# Altium PCB 08-DcMotorEncoder.PcbDoc
Units mm, origin at the board's own origin, x right, y up, seen from the top; angles counter-clockwise.
Board outline 40 x 40 mm, 4 copper layers (Top Layer, Internal Plane 1, Internal Plane 2, Bottom Layer), stack 0.462 mm thick; 42 components, 26 nets, 133 pads, 0 vias.
Unrouted connection lines stored in the file: 88.
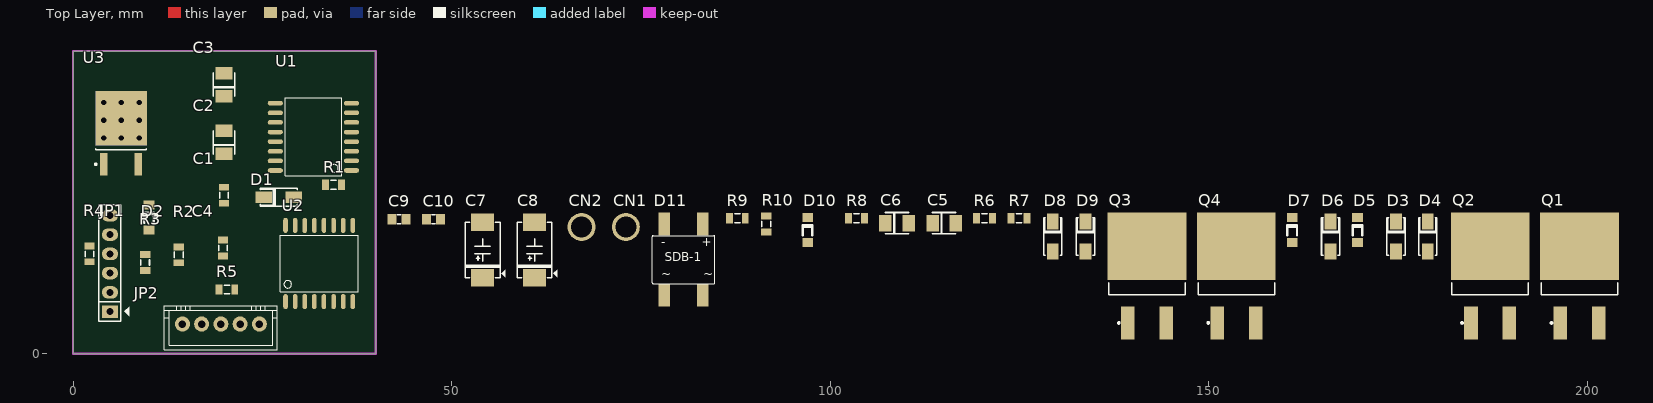
[diagram p0: Top Layer view]
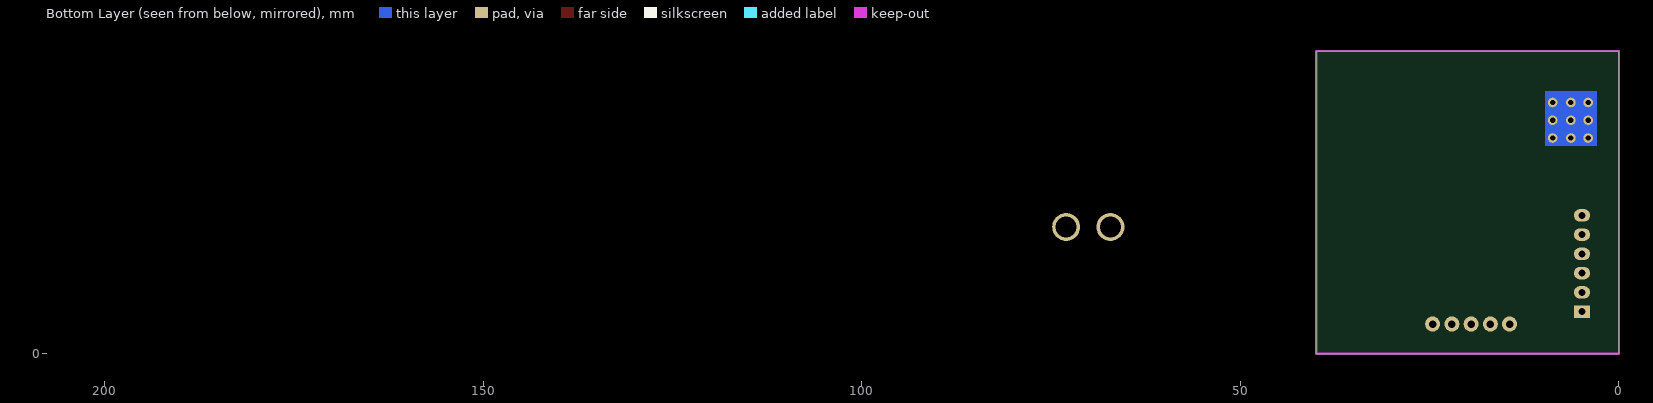
[diagram p1: Bottom Layer view, seen from below]
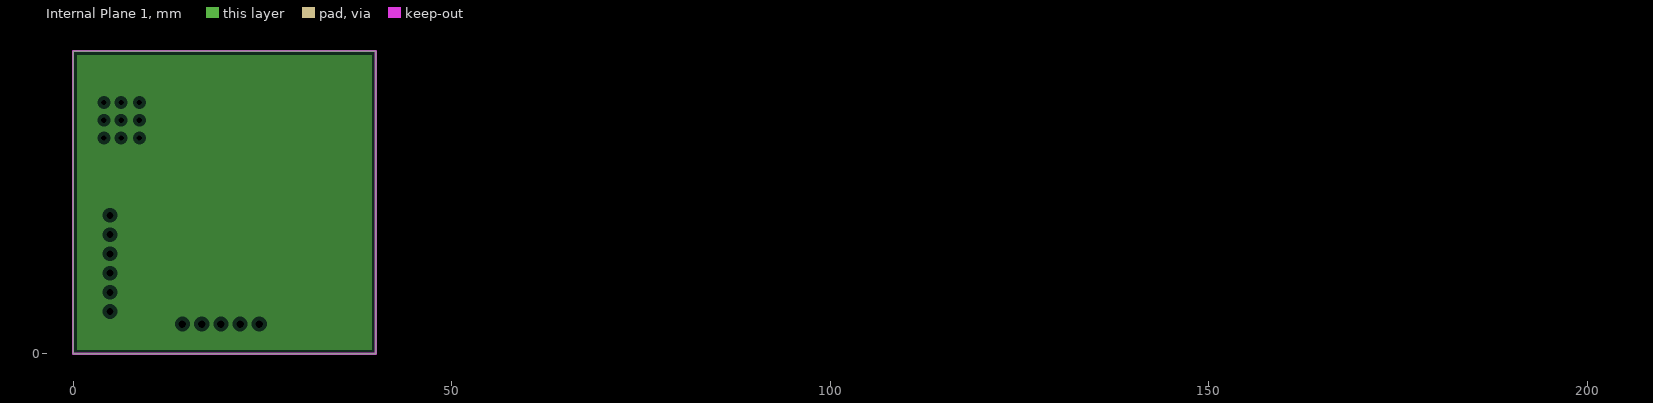
[diagram p2: Internal Plane 1, clearances drawn from the general rule]
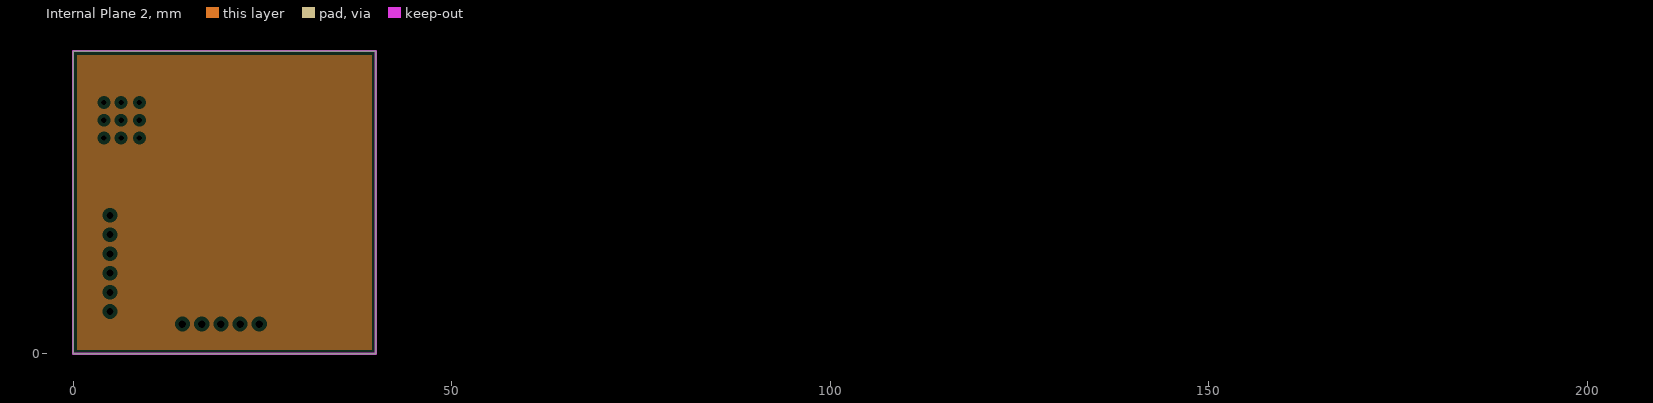
[diagram p3: Internal Plane 2, clearances drawn from the general rule]

## Layer stack, top to bottom
Top Solder: solder mask 0.0102, Solder Resist, Dk 3.5
Top Layer: signal copper 0.0356
Internal Plane 1: plane copper 0.0356
Internal Plane 2: plane copper 0.0356
Dielectric 1: dielectric 0.32, FR-4, Dk 4.8
Bottom Layer: signal copper 0.0356
Bottom Solder: solder mask 0.0102, Solder Resist, Dk 3.5

## Board outline
0,0 0,40 40,40 40,0

## Design rules (kind name [scope] priority, off if disabled: settings)
Clearance [All] p1: gap=0.2
PlaneClearance [All] p1: clearance=0.508
PlaneConnect [All] p1: planeconnectstyle=Relief reliefexpansion=0.508 reliefentries=4 reliefconductorwidth=0.254 reliefairgap=0.254
PolygonConnect [All] p1: connectstyle=Relief reliefconductorwidth=0.254 reliefentries=4 polygonreliefangle="90 Angle" airgapwidth=0.254
RoutingVias [All] p1: holewidth=0.6 width=1 viastyle="Through Hole" minholewidth=0.711 minwidth=1.27 maxholewidth=0.711 maxwidth=1.27
SolderMaskExpansion [All] p1: expansion=0.102
Width [All] p1: maxlimit=0.2 minlimit=0.2 preferedwidth=0.2
28 further rules are at their usual default settings.

## Components (designator, comment, footprint, x,y, rotation, side; value= is the part's Value field where it differs from the comment)
C1 "104" R-0805 19.939,20.951 r90 top (schematic designator c1)
C2 "10U16V" C-TANT-1210 19.939,27.933 r90 top
C3 "10U16V" C-TANT-1210 19.939,35.56 r90 top
C4 "104" R-0805 19.812,13.97 r90 top (schematic designator c4)
C5 "10U16V" C-TANT-1210 115.062,17.272 r0 top
C6 "10U16V" C-TANT-1210 108.839,17.272 r0 top
C7 "470uF" C-TANT-7343-31-CASEA 54.102,13.716 r90 top
C8 "470uF" C-TANT-7343-31-CASEA 60.96,13.716 r90 top
C9 "104" C-0805 43.053,17.78 r0 top
C10 "104" C-0805 47.625,17.78 r0 top
CN1 "COCDONGM3" M3 73.025,16.764 r0 top
CN2 "COCDONGM3" M3 67.183,16.764 r0 top
D1 "1N4007" D-DO214-AC 27.178,20.701 r180 top
D2 "1N4148" D-DO213-AA 10.033,16.383 r90 top
D3 "1N4007" D-DO214-AC 174.752,15.494 r90 top
D4 "1N4007" D-DO214-AC 178.943,15.494 r90 top
D5 "1N4148" D-DO213-AA 169.672,14.732 r90 top
D6 "1N4007" D-DO214-AC 166.116,15.494 r90 top
D7 "1N4148" D-DO213-AA 161.036,14.732 r90 top
D8 "1N4007" D-DO214-AC 129.413,15.494 r90 top
D9 "1N4007" D-DO214-AC 133.731,15.494 r90 top
D10 "1N4148" D-DO213-AA 97.028,14.732 r90 top
D11 "DB 1A" D-DB-1A-SMD 80.645,12.446 r0 top
JP1 "MCU CTR" JP6 4.886,5.588 r90 top
JP2 "DC MOTOR" CONN-XH2.54-5P 19.531,3.937 r180 top
Q1 "IRFS4410" TO-263-3 199.009,10.287 r90 top
Q2 "IRFS4410" TO-263-3 187.198,10.287 r90 top
Q3 "IRFS4410" TO-263-3 141.859,10.287 r90 top
Q4 "IRFS4410" TO-263-3 153.67,10.287 r90 top
R1 "22" R-0805 34.417,22.339 r0 top
R2 "10K" R-0805 13.97,13.081 r90 top
R3 "10K" R-0805 9.525,12.065 r90 top
R4 "22" R-0805 2.159,13.208 r90 top
R5 "22" R-0805 20.32,8.509 r0 top
R6 "10K" R-0805 120.396,17.907 r0 top
R7 "10K" R-0805 124.968,17.907 r0 top
R8 "22" R-0805 103.505,17.907 r0 top
R9 "1K" R-0805 87.757,17.907 r0 top
R10 "1K" R-0805 91.567,17.145 r90 top
U1 "IR2110" SOIC-16-W 31.75,28.667 r90 top
U2 "IR2110" SOIC-16-W 32.512,11.938 r0 top
U3 "ASM1117" TO-252 6.35,29.142 r90 top

## Footprints (in the part's own frame and the unit in brackets; to place one, negate y for a bottom-side part, rotate by r counter-clockwise, add the part's x,y. Pads: shape width x height; smd on the part's side, far side on the other; paste and mask are expansions set on the pad)
C-0805 [mm] "Chip Capacitor, 2-Leads, Body 2.0x1.3mm, IPC Medium Density"
  rect 1.15x1.4 smd: 1(-0.925,0) 2(0.925,0)
  silkscreen extent -0.22,-0.6 0.23,0.6, body extent -1,-0.63 1,0.63, height 0.5
C-TANT-1210 [mil]
  rect 65x86.61 smd: 1(-60,0) 2(60,0)
  silkscreen extent -61,-55 61,55, body extent -70,-55 70,55, height 75
C-TANT-7343-31-CASEA [mm] "Tantalium Capacitor 7343-31"
  rect 2.3x3 smd: 1(-3.65,0) 2(3.65,0)
  silkscreen extent -3.65,-3 3.65,2.3, body extent -3.8,-2.3 3.8,2.3, height 3.1
CONN-XH2.54-5P [mm]
  round 2 hole 1: 1(-5.08,0) 2(-2.54,0) 3(0,0) 4(2.54,0) 5(5.08,0)
  silkscreen extent -7.45,-2.4 7.45,3.4, body extent -7.45,-2.4 7.45,3.4, height 7.05
D-DB-1A-SMD [mm] "DB106S"
  rect 1.5x3 smd: 1(-2.55,-4.713) 2(2.55,-4.713) 3(2.55,4.713) 4(-2.55,4.713)
  silkscreen extent -4.15,-3.18 4.15,3.18, body extent -4.15,-4.95 4.15,4.95, height 3.35
D-DO213-AA [mm]
  rect 1.2x1.4 smd: 1(0,0) 2(3.302,0)
  silkscreen extent 0.89,-0.63 2.29,0.64, body extent 0,-0.75 3.3,0.75, height 1.5
D-DO214-AC [mm] "Molded Diode, 2-Leads, Body 4.3x2.6mm, IPC Medium Density"
  rect 2.15x1.55 smd: 1(-1.979,0) 2(1.979,0)
  silkscreen extent -2.46,-1.25 2.46,1.25, body extent -2.46,-1.2 2.46,1.2, height 2.45
JP6 [mil] "JP6"
  rect 65x85 hole 36: 1(0,0)
  oval 65x85 hole 36: 2(100,0) 3(200,0) 4(300,0) 5(400,0) 6(500,0)
  silkscreen extent -50,-99 556,58, body extent -48,-50 548,48, height 323
M3 [mm]
  round 3.7 hole 2.8: 1(0,0)
R-0805 [mm] "Chip Resistor, 2-Leads, Body 2.0x1.3mm, IPC Medium Density"
  rect 0.9x1.35 smd: 1(-1.05,0) 2(1.05,0)
  silkscreen extent -0.38,-0.58 0.38,0.58, body extent -1,-0.63 1,0.63, height 0.5
SOIC-16-W [mm]
  oval 0.6x2 smd: 1(-4.445,-5.031) 2(-3.175,-5.031) 3(-1.905,-5.031) 4(-0.635,-5.031) 5(0.635,-5.031) 6(1.905,-5.031) 7(3.175,-5.031) 8(4.445,-5.031) 9(4.445,5.031) 10(3.175,5.031) 11(1.905,5.031) 12(0.635,5.031) 13(-0.635,5.031) 14(-1.905,5.031) 15(-3.175,5.031) 16(-4.445,5.031)
  silkscreen extent -5.15,-3.75 5.15,3.75, body extent -5.15,-5.16 5.15,5.16, height 2.9
TO-252 [mm] "AMS1117"
  rect 3x1 smd: 1(-4.1,2.29) 3(-4.1,-2.29)
  round 1.27 hole 0.7: 2(-0.635,2.286) 2(-0.635,0) 2(-0.635,-2.413) 2(1.714,-2.413) 2(1.714,0) 2(1.714,2.286) 2(4.064,-2.413) 2(4.064,0) 2(4.064,2.286)
  rect 7.2x6.8 smd: 2(1.95,0)
  Bottom Layer region: -1.651,3.404 5.563,3.404 5.563,-3.404 -1.626,-3.404 -1.651,-3.404 -1.651,-3.378
  silkscreen extent -4.22,-3.35 -2.05,3.46, body extent -4.55,-3.37 5.36,3.37, height 2.39
TO-263-3 [mm] "D2-PAK, 3-Pads, Body 9.0x10.1mm (max), IPC Medium Density"
  rect 4.4x1.8 smd: 1(-6.2,2.54) 3(-6.2,-2.54)
  rect 8.9x10.4 smd: 2(3.95,0)
  silkscreen extent -6.32,-5.05 -0.9,5.05, body extent -7.89,-5.25 7.63,5.25, height 4.65

## Part data
C1 C4: library part "CAP NP"
C2 C3 C5 C6: library part "CAP POL"
C7 C8: library part CP1, "Cap P  0,1uF < 22uF , 16 - 50V"
C9 C10: library part CN
D1 D2 D3 D4 D5 D6 D7 D8 D9 D10: library part DIODE
D11: library part DB
JP1: library part JP6, "JP6 PIN"
JP2: library part JP5
R1 R2 R3 R4 R5 R6 R7 R8 R9 R10: library part Res1, "Resistor"

## Nets (pads, with @x,y where several pads share a name; then routed paths per layer and width w, separated by ;. In a path a pad name is that pad's centre, name@x,y a point inside that pad or via, vN(x,y) a via of type N, cw(c..) or ccw(c..) an arc to the next point about the centre after c; other vN are vias at no path point)
+5V: C8.1 C10.2
+5VDL: C1.2 C4.2 JP2.3 U1.11 U2.11 U3.2
+12V: C7.1 C9.2
+12VDL: C3.1 C6.1 D1.1 D6.1 U1.3 U2.3
+24VDL: D3.2 D4.2 D11.3 Q1.2 Q2.2 U3.3
CLK: JP1.2 JP2.5 R10.2
DIRA: JP1.4 U2.14
DIRB: JP1.6 U1.14
GND: C1.1 C3.2 C4.1 C6.2 C7.2 C8.2 C9.1 C10.1 D8.1 D9.1 D11.4 JP1.1 Q3.3 Q4.3 R6.1 R7.1 R9.1 R10.1 U1.2 U1.13 U1.15 U2.2 U2.13 U2.15 U3.1
M1H: D2.1 Q1.1 R1.2 R2.2
M1L: D5.1 Q3.1 R4.2 R6.2
M2H: D7.1 Q2.1 R3.2 R5.2
M2L: D10.1 Q4.1 R7.2 R8.2
MOTOR1L: C2.2 D3.1 D8.2 JP2.2 Q1.3 Q3.2 R2.1 U1.6
MOTOR1R: C5.2 D4.1 D9.2 JP2.1 Q2.3 Q4.2 R3.1 U2.6
NetC2_1: C2.1 D1.2 U1.7
NetC5_1: C5.1 D6.2 U2.7
NetCN1_1: CN1.1 D11.2
NetCN2_1: CN2.1 D11.1
NetD2_2: D2.2 R1.1 U1.8
NetD5_2: D5.2 R4.1 U1.1
NetD7_2: D7.2 R5.1 U2.8
NetD10_2: D10.2 R8.1 U2.1
NetJP2_4: JP2.4 R9.2
PWMA: JP1.3 U1.12
PWMB: JP1.5 U2.12
pads on no net: U1.4 U1.5 U1.9 U1.10 U1.16 U2.4 U2.5 U2.9 U2.10 U2.16

## Keep-outs
Keep-Out Layer:
  the board outline again, w0.3

## Text inside footprints (layer, text, board x,y; h text height)
D11: Top Overlay "SDB-1" at 78.137,11.806 h2; Top Overlay "-         +" at 77.724,13.843 h2; Top Overlay "~        ~" at 77.724,9.652 h2